# Altium PCB PCB1.PcbDoc
Units mm, origin at the board's own origin, x right, y up, seen from the top; angles counter-clockwise.
Board outline 96 x 98 mm, 2 copper layers (Top Layer, Bottom Layer); 46 components, 44 nets, 243 pads, 56 vias.
Unrouted connection lines stored in the file: 20.
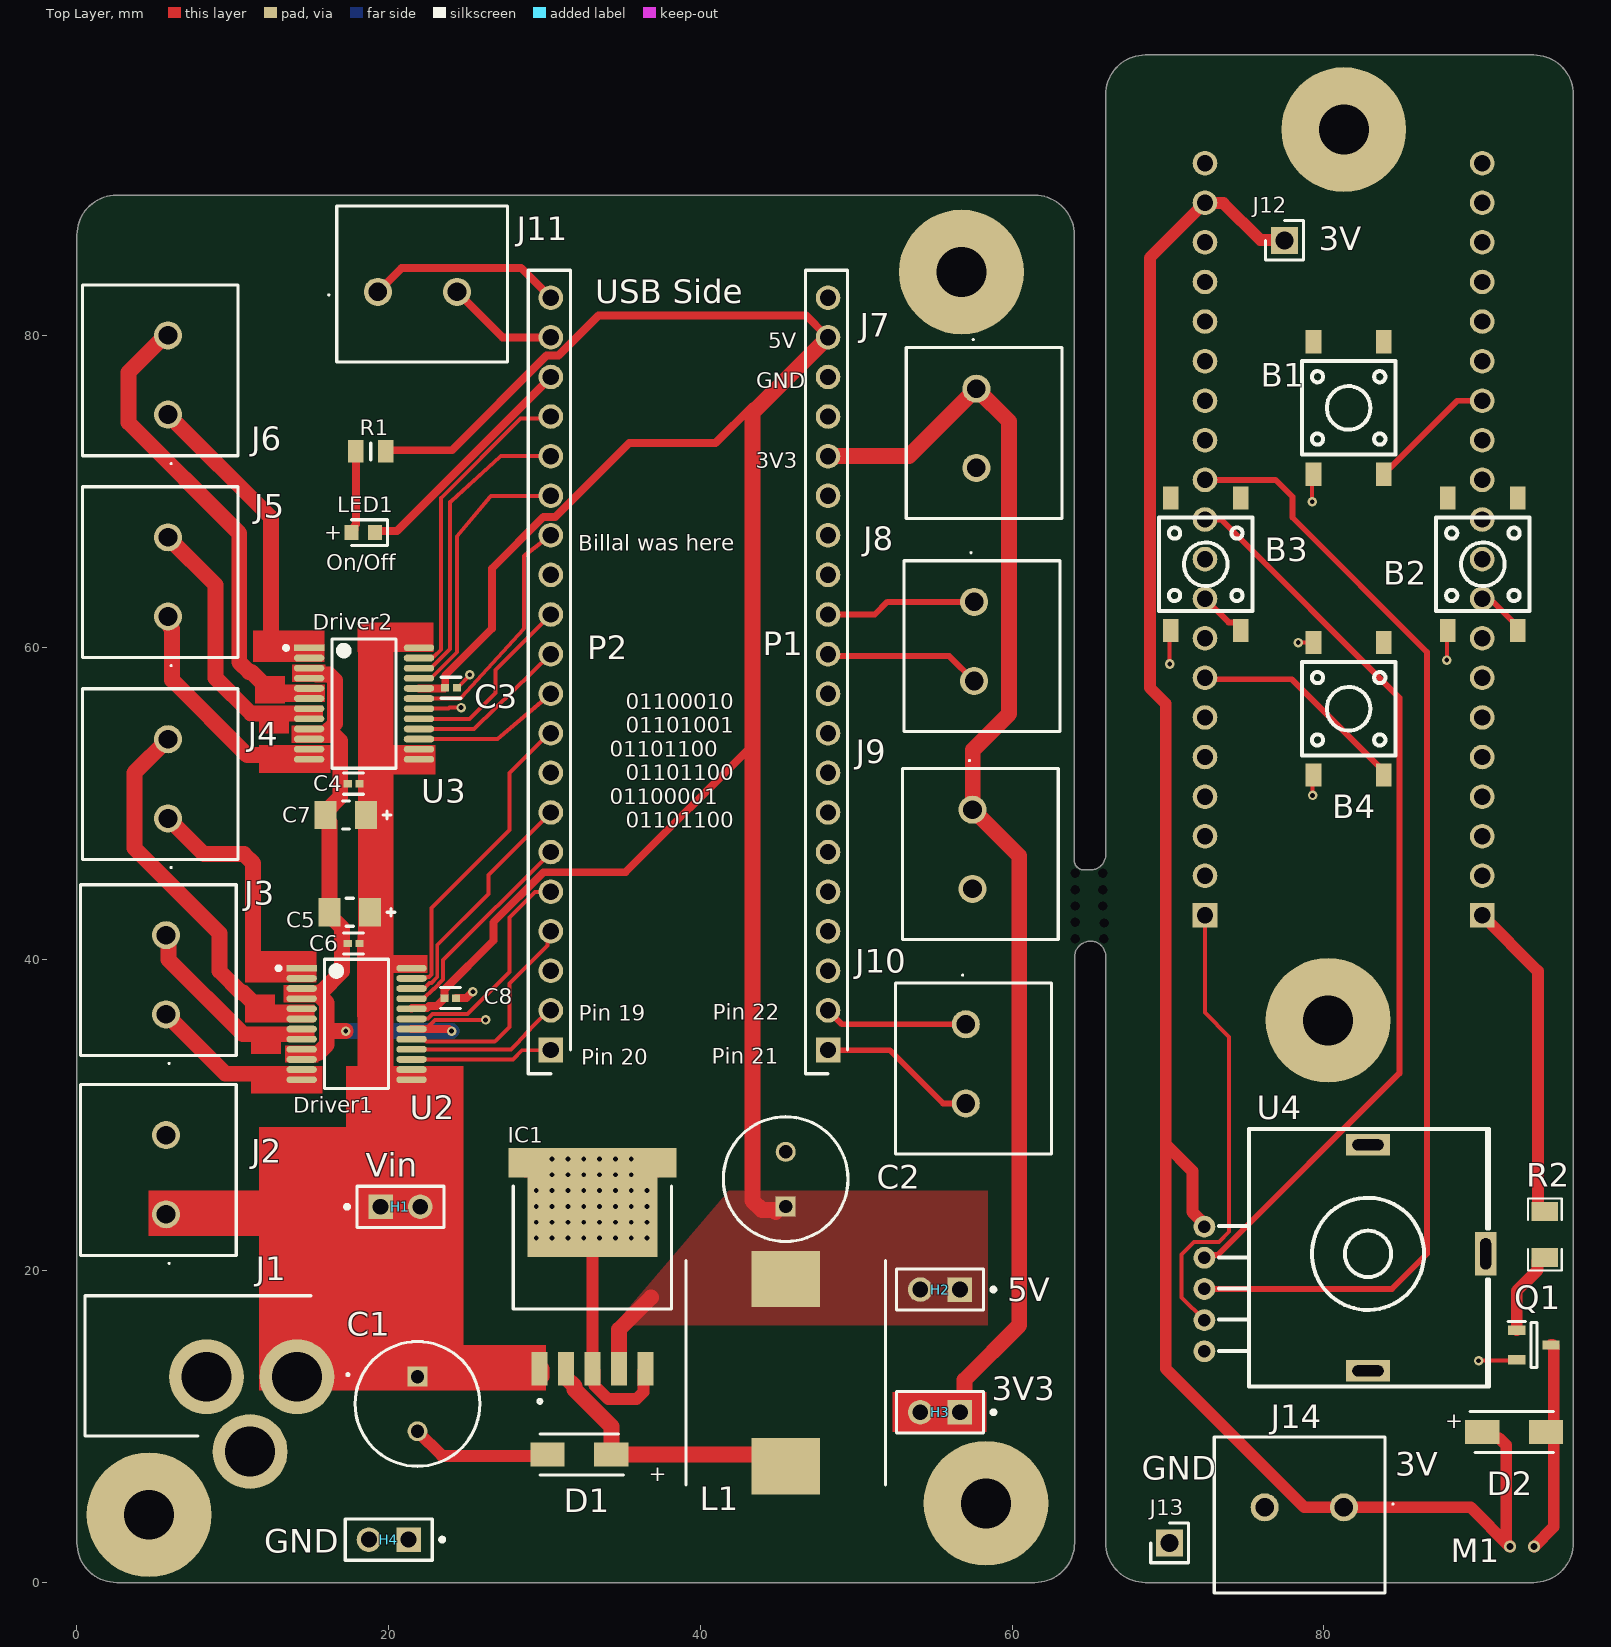
[diagram p0: Top Layer view]
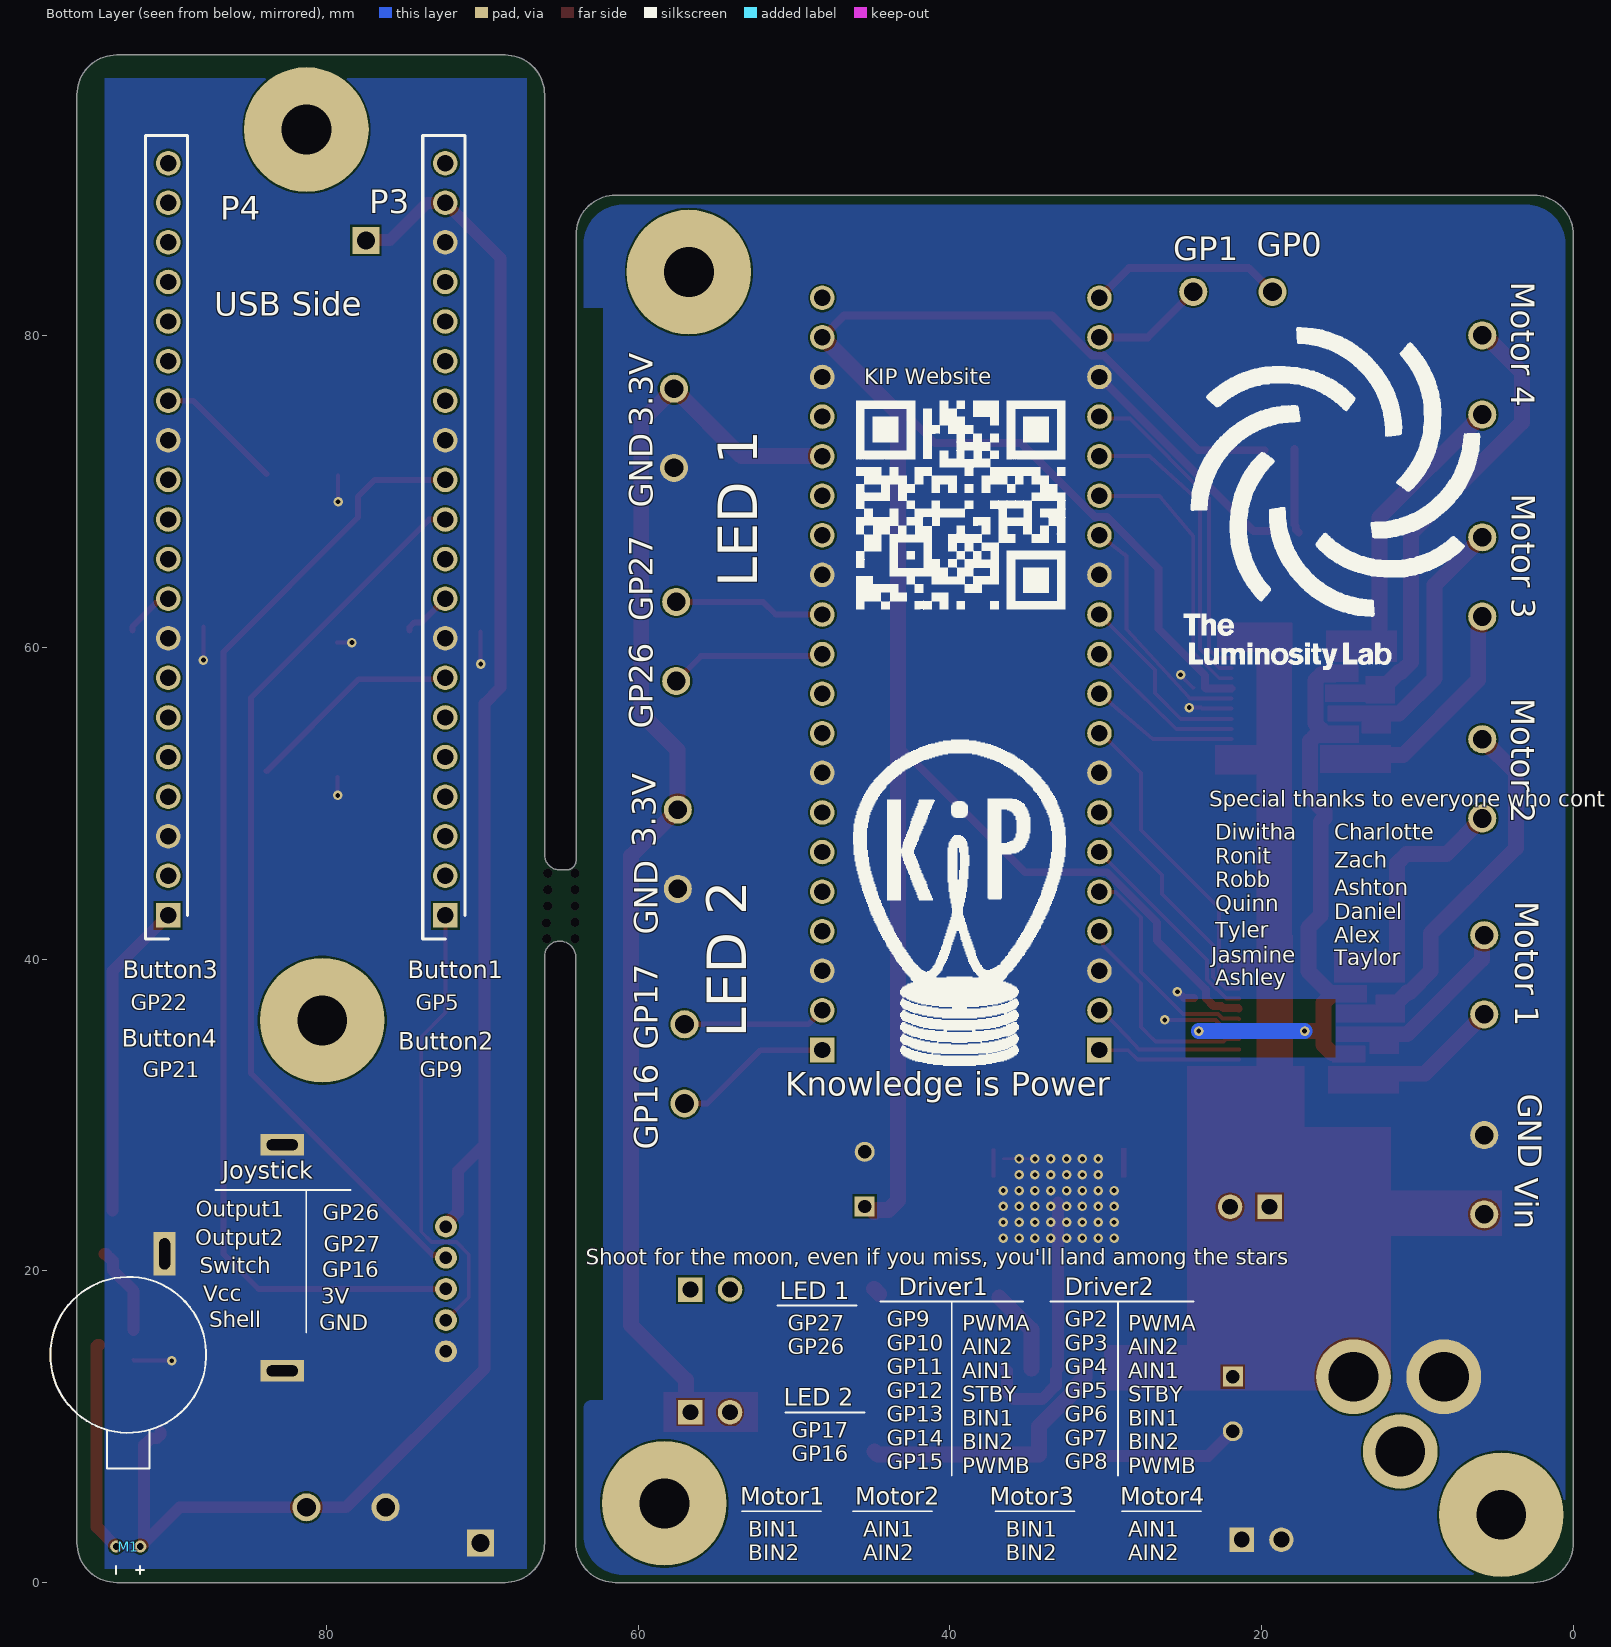
[diagram p1: Bottom Layer view, seen from below]
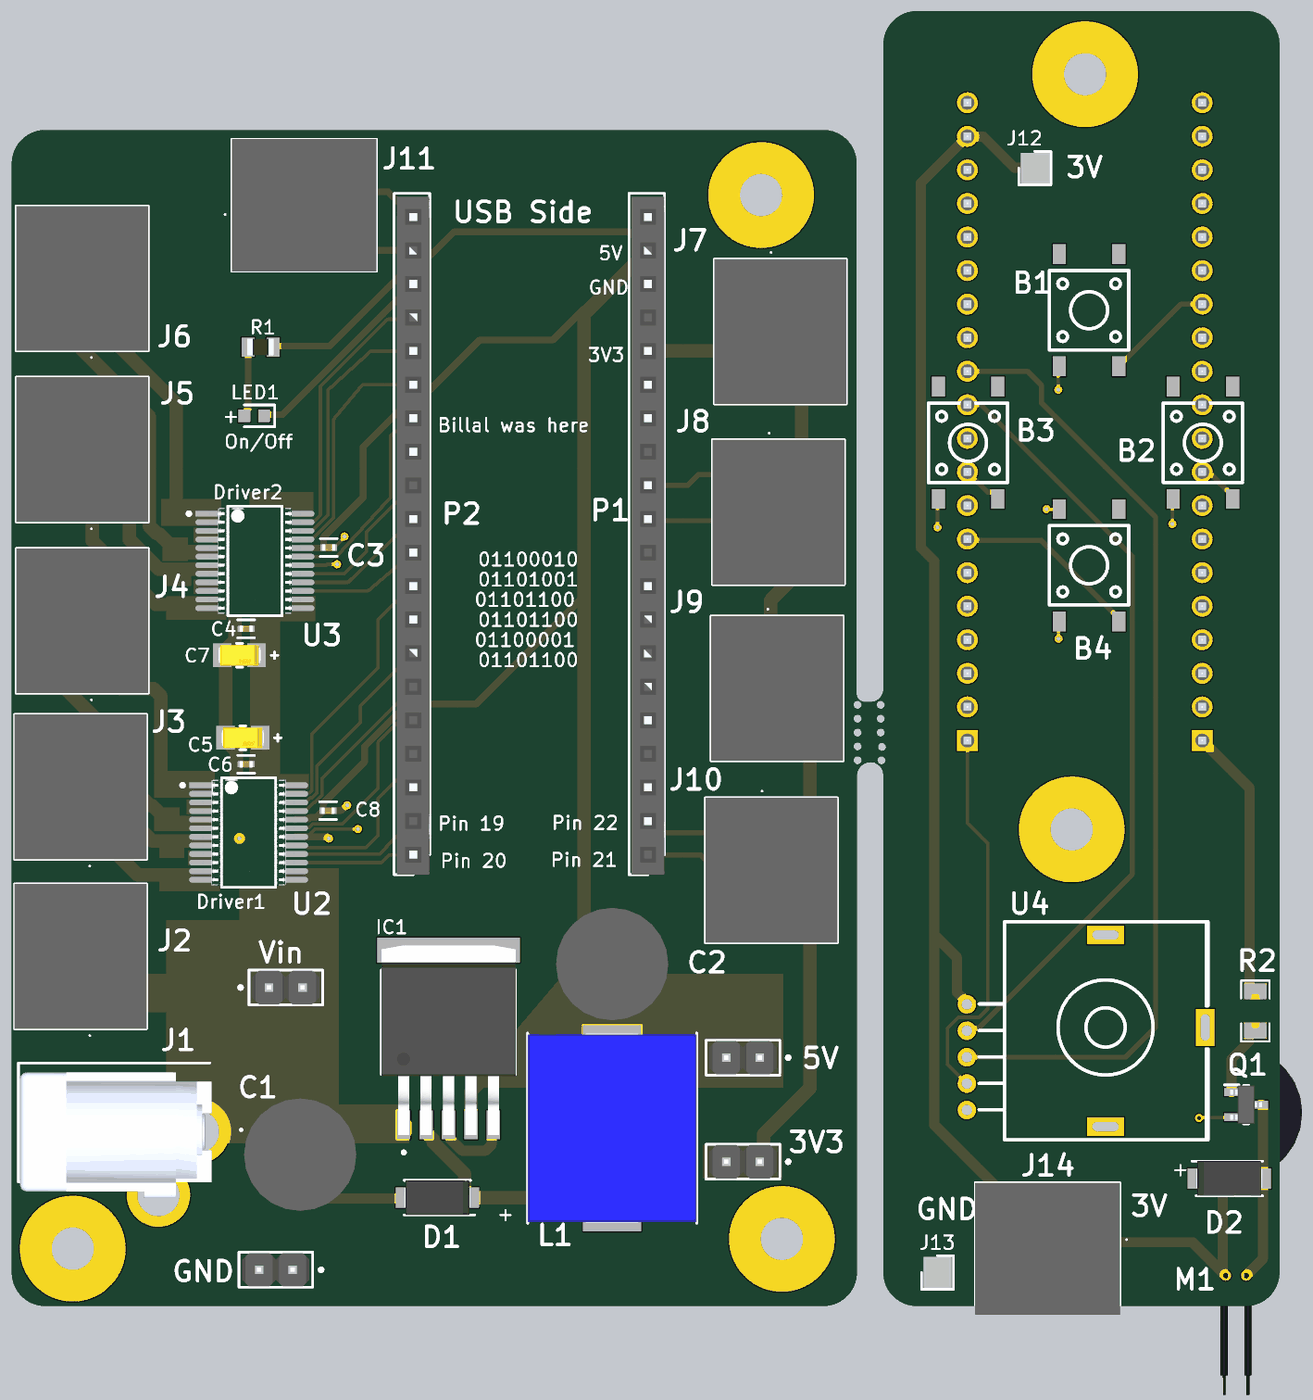
[diagram p2: 3D render of the assembled board from above, using the file's embedded part models]
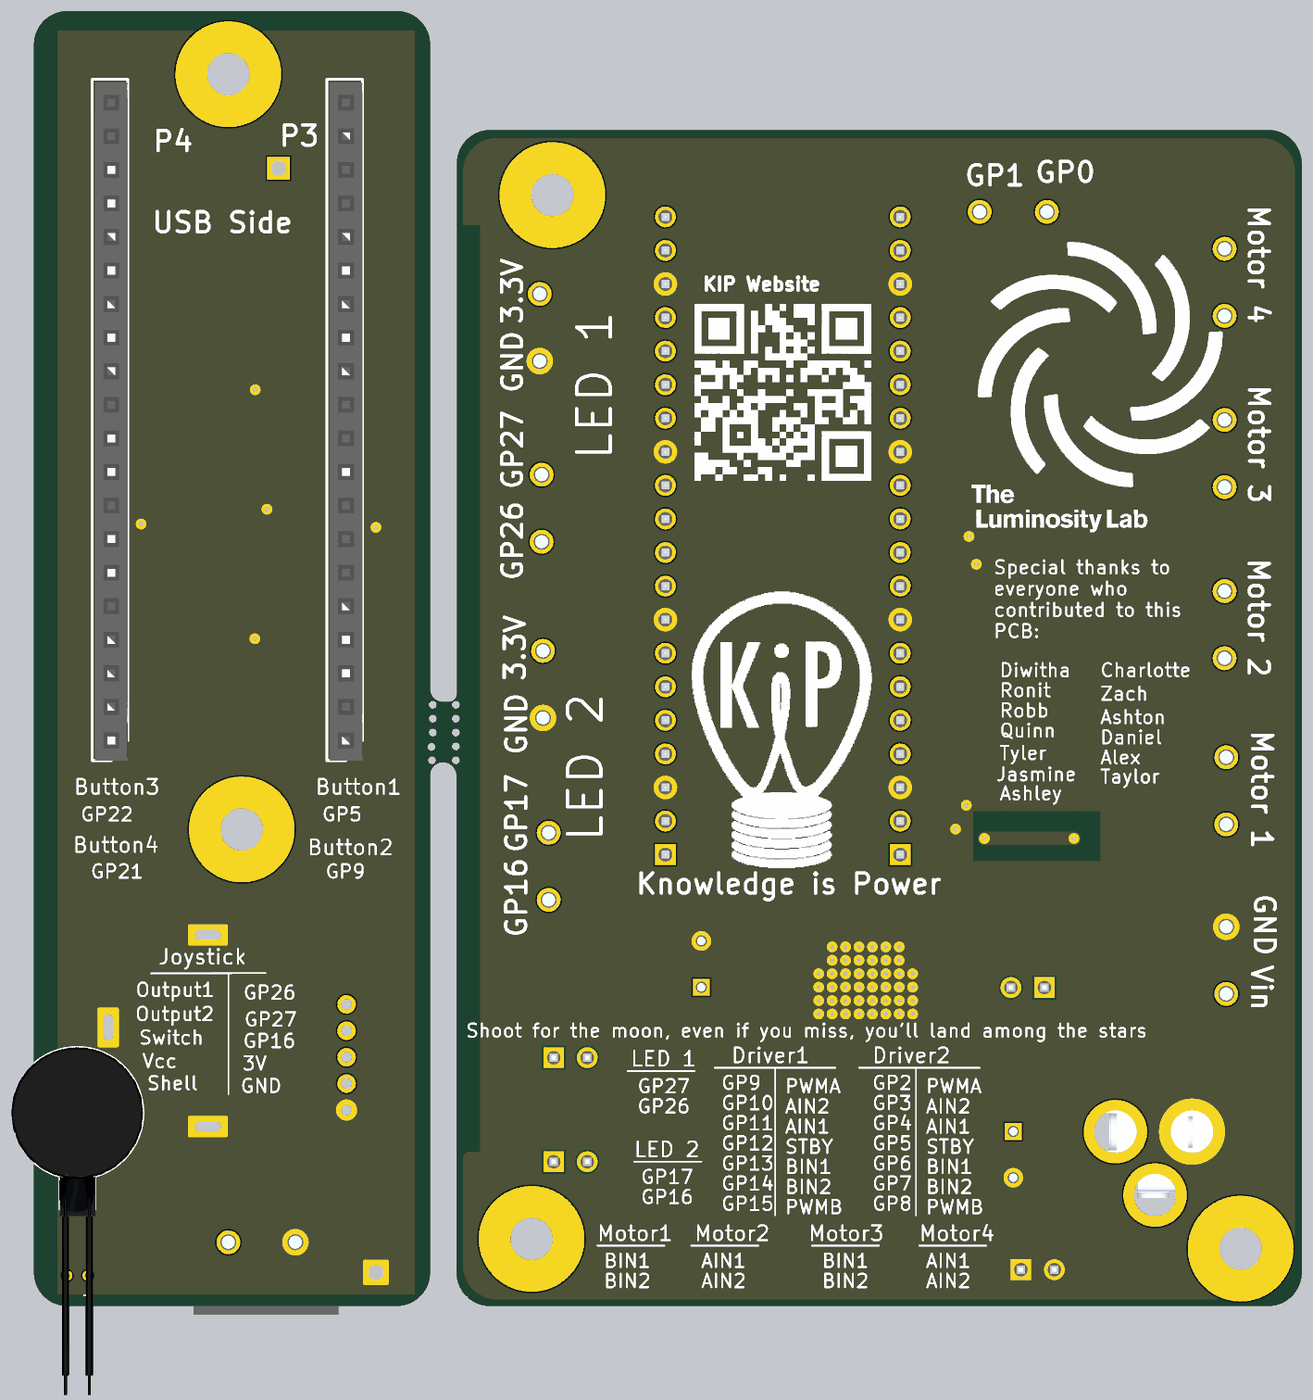
[diagram p3: 3D render of the assembled board from below, using the file's embedded part models]

## Layer stack, top to bottom
Top Solder: solder mask 0.0102, Solder Resist, Dk 3.5
Top Layer: signal copper 0.0356
Dielectric 1: dielectric 0.32, FR-4, Dk 4.8
Bottom Layer: signal copper 0.0356
Bottom Solder: solder mask 0.0102, Solder Resist, Dk 3.5

## Board outline
0,2.54 ccw(c2.54,2.54) 2.54,0 61.46,0 ccw(c61.46,2.54) 64,2.54 64,40.124 cw(c65.024,40.124) 65.024,41.148 cw(c65.024,40.172) 66,40.172 66,2.54 ccw(c68.54,2.54) 68.54,0 93.46,0 ccw(c93.46,2.54) 96,2.54 96,95.46 ccw(c93.46,95.46) 93.46,98 68.54,98 ccw(c68.54,95.46) 66,95.46 66,46.696 cw(c65.024,46.696) 65.024,45.72 64.592,45.72 cw(c64.592,46.33) 63.983,46.33 63.983,86.46 ccw(c61.443,86.46) 61.443,89 2.54,89 ccw(c2.54,86.46) 0,86.46 0,63

## Design rules (kind name [scope] priority, off if disabled: settings)
Clearance [All] p1: gap=0.127 ignorepadtopadclearanceinfootprint=TRUE
HoleSize [All] p1 off: absolutevalues=TRUE maxlimit=6.299 minlimit=0.152 maxpercent=80.000 minpercent=20.000
MinimumSolderMaskSliver [All] p1 off: minsoldermaskwidth=0.198
PolygonConnect [All] p1: connectstyle=Direct reliefconductorwidth=0.254 reliefentries=4 polygonreliefangle="90 Angle" airgapwidth=0.254
RoutingVias [All] p1: holewidth=0.305 width=0.61 viastyle="Through Hole" minholewidth=0.305 minwidth=0.457 maxholewidth=0.61 maxwidth=1.219
ShortCircuit [InNet('5V') vs InNet(' 5V')] p1: allowed=TRUE
SilkToSilkClearance [All] p1 off: silktosilkclearance=0.254
SilkToSolderMaskClearance [IsPad] p1 off: minsilkscreentomaskgap=0.178 clearancetoexposedcopper=TRUE
SolderMaskExpansion [All] p1: expansion=0.102 istentingtop=FALSE
SupplyNets "Schematic Supply Nets_4" [InNet('+3')] p1: voltage=0.000
SupplyNets "Schematic Supply Nets_3" [InNet('+12')] p2: voltage=0.000
SupplyNets "Schematic Supply Nets_2" [InNet('+5')] p3: voltage=0.000
SupplyNets "Schematic Supply Nets_1" [InNet('3V3')] p4: voltage=0.000
SupplyNets "Schematic Supply Nets" [InNet('GND')] p5: voltage=0.000
UnRoutedNet [All] p1 off:
Width Width_1 [All] p1 off: maxlimit=0.254 minlimit=0.254 preferedwidth=0.254
Width [All] p2: maxlimit=1.016 minlimit=0.102 preferedwidth=0.152
24 further rules are at their usual default settings.

## Classes and differential pairs
component class KIP_2Schematic: B1 B2 B3 B4 C1 C2 C3 C4 C5 C6 C7 C8 D1 D2 H1 H2 H3 H4 IC1 J1 J2 J3 J4 J5 J6 J7 J8 J9 J10 J11 J12 J13 J14 L1 LED1 M1 Q1 R1 R2 U2 U3 U4

## Components (designator, comment, footprint, x,y, rotation, side; value= is the part's Value field where it differs from the comment)
B1 "C255812" Button 81.534,75.438 r90 top
B2 "C255812" Button 90.148,65.405 r90 top
B3 "C255812" Button 72.368,65.405 r90 top
B4 "C255812" Button 81.534,56.134 r90 top
C1 "470uF" CAPPRD350W65D800H2200 21.844,13.208 r270 top
C2 "470uF" CAPPRD350W65D800H2200 45.466,24.13 r90 top
C3 "0.1uF" FP-CL779-IPC_C 24.003,57.404 r0 top
C4 "0.1uF" FP-CL779-IPC_C 17.75,51.25 r180 top
C5 "10uF" FP-TAJA-MFG 17.5,43 r0 top
C6 "0.1uF" FP-CL779-IPC_C 17.75,41 r180 top
C7 "10uF" FP-TAJA-MFG 17.25,49.25 r0 top
C8 "0.1uF" FP-CL779-IPC_C 23.952,37.49 r0 top
D1 "SS34A" DIOM5026X262N 32.233,8.204 r180 top
D2 "SS34A" DIOM5026X262N 92.202,9.652 r0 top
H1 "12V" FP-M20-9990246-MFG 20.752,24.105 r0 top
H2 "5V" FP-M20-9990246-MFG 55.372,18.796 r180 top
H3 "3V3" FP-M20-9990246-MFG 55.372,10.922 r180 top
H4 "GND" FP-M20-9990246-MFG 20,2.75 r180 top
IC1 "Buck Converter" KTT0005B 33.069,26.177 r270 top
J1 "Barrel Jack" 694106301002_1 0.508,9.398 r0 top
J2 "WJ500V-5.08-2P" WJ500V5082P 5.715,23.622 r90 top
J3 "WJ500V-5.08-2P" WJ500V5082P 5.715,36.449 r90 top
J4 "WJ500V-5.08-2P" WJ500V5082P 5.842,49.022 r90 top
J5 "WJ500V-5.08-2P" WJ500V5082P 5.842,61.976 r90 top
J6 "WJ500V-5.08-2P" WJ500V5082P 5.842,74.93 r90 top
J7 "WJ500V-5.08-2P" WJ500V5082P 57.7,76.59 r270 top
J8 "WJ500V-5.08-2P" WJ500V5082P 57.556,62.916 r270 top
J9 "WJ500V-5.08-2P" WJ500V5082P 57.455,49.581 r270 top
J10 "WJ500V-5.08-2P" WJ500V5082P 57.023,35.814 r270 top
J11 "WJ500V-5.08-2P" WJ500V5082P 19.304,82.804 r0 top
J12 "87224-1" HDRV1W66P0X254_1X1_213X254X1074P 77.47,86.106 r0 top
J13 "87224-1" HDRV1W66P0X254_1X1_213X254X1074P 70.104,2.54 r0 top
J14 "WJ500V-5.08-2P" WJ500V5082P 81.28,4.826 r180 top
L1 "33uH" INDPM144128X650N 45.466,13.462 r270 top
LED1 "KT-0603R" LEDC1608X70N 18.364,67.361 r180 top
M1 "Haptic Feedback" "Haptic Feedback" 92.456,14.478 r270 bottom
P1 "Comment" 20pin 48.184,34.163 r90 top
P2 "Comment" 20pin 30.404,34.163 r90 top
P3 "Comment" 20pin 72.368,42.799 r90 bottom
P4 "Comment" 20pin 90.148,42.799 r90 bottom
Q1 "C2150" SOT95P240X115-3N 93.472,15.24 r0 top
R1 "0805W8F2200T5E" RESC2013X65N 18.847,72.568 r180 top
R2 "C17887" "Resistor 300Ohms" 94.234,22.352 r270 top
U2 "TB6612FNG,C,8,EL" FP-SSOP24-P-300-0_65A-IPC_A 17.938,35.833 r0 top
U3 "TB6612FNG,C,8,EL" FP-SSOP24-P-300-0_65A-IPC_A 18.415,56.388 r0 top
U4 "C42411044" "Correct Joystick" 82.804,21.082 r270 top

## Footprints (in the part's own frame and the unit in brackets; to place one, negate y for a bottom-side part, rotate by r counter-clockwise, add the part's x,y. Pads: shape width x height; smd on the part's side, far side on the other; paste and mask are expansions set on the pad)
20pin [mm]
  rect 1.575x1.575 hole 1.05: 1(0,0)
  round 1.575 hole 1.05: 2(2.54,0) 3(5.08,0) 4(7.62,0) 5(10.16,0) 6(12.7,0) 7(15.24,0) 8(17.78,0) 9(20.32,0) 10(22.86,0) 11(25.4,0) 12(27.94,0) 13(30.48,0) 14(33.02,0) 15(35.56,0) 16(38.1,0) 17(40.64,0) 18(43.18,0) 19(45.72,0) 20(48.26,0)
  silkscreen extent -1.52,-1.25 50.03,1.45, body extent -1.52,-1.25 49.78,1.25, height 8.65
694106301002_1 [mm]
  round 4.8 hole 3.2: 1(13.6,3.8) 2(7.8,3.8) 3(10.6,-1)
  silkscreen extent 0,0 16.93,9, body extent 0.12,-1.22 14.62,8.28, height 11.02
Button [mm]
  rect 1.5x1 smd: 1(-4.33,2.202) 2(4.17,2.202) 3(-4.33,-2.298) 4(4.17,-2.298)
  silkscreen extent -3.08,-3.05 2.92,2.95
CAPPRD350W65D800H2200 [mm]
  rect 1.275x1.275 hole 0.85: 1(0,0)
  round 1.275 hole 0.85: 2(3.5,0)
  silkscreen extent -2.25,-4 5.75,4, body extent -2.49,-4.25 6,4.25, height 22
"Correct Joystick" [mm]
  round 1.4 hole 0.8: 1(-1.751,-10.476) 2(0.249,-10.476) 3(2.249,-10.476) 4(4.249,-10.476) 5(6.249,-10.476)
  rect 1.4x2.8 hole 0.7 slot 2 at 90 deg: 6(-7.001,0.024) 6(7.499,0.024)
  rect 2.8x1.4 hole 0.7 slot 2 at 0 deg: 6(-0.001,7.574)
  silkscreen extent -8,-9.55 8.51,7.77
DIOM5026X262N [mm]
  rect 2.2x1.55 smd: 1(-2.05,0) 2(2.05,0)
  silkscreen extent -2.83,-1.31 2.52,1.31, body extent -2.52,-1.31 2.52,1.31, height 2.62
FP-CL779-IPC_C [mm]
  rect 0.515x0.472 smd paste+0 mask+0: 1(-0.379,0) 2(0.379,0)
  silkscreen extent -0.64,-0.67 0.64,0.67, body extent -0.74,-0.38 0.74,0.38, height 0.25
FP-M20-9990246-MFG [mm]
  rect 1.57x1.57 hole 1.02 paste-2539.97 mask+0: 1(-1.27,0)
  round 1.57 hole 1.02 paste-2539.97 mask+0: 2(1.27,0)
  silkscreen extent -3.55,-1.32 2.79,1.32, body extent -2.89,-1.42 2.89,1.42, height 0.25
FP-SSOP24-P-300-0_65A-IPC_A [mm]
  rect 1.954x0.432 smd paste+0 mask+0: 1(-3.525,3.575)
  rrect100% 1.954x0.432 smd paste+0 mask+0: 2(-3.525,2.925) 3(-3.525,2.275) 4(-3.525,1.625) 5(-3.525,0.975) 6(-3.525,0.325) 7(-3.525,-0.325) 8(-3.525,-0.975) 9(-3.525,-1.625) 10(-3.525,-2.275) 11(-3.525,-2.925) 12(-3.525,-3.575) 13(3.525,-3.575) 14(3.525,-2.925) 15(3.525,-2.275) 16(3.525,-1.625) 17(3.525,-0.975) 18(3.525,-0.325) 19(3.525,0.325) 20(3.525,0.975) 21(3.525,1.625) 22(3.525,2.275) 23(3.525,2.925) 24(3.525,3.575)
  silkscreen extent -5.13,-4.15 2.05,4.15, body extent -5,-4.65 5,4.65, height 0.25
FP-TAJA-MFG [mm]
  rect 1.4x1.8 smd paste+0 mask+0: 1(-1.3,0) 2(1.3,0)
  silkscreen extent -0.23,-0.9 2.9,0.9, body extent -2.1,-1 2.1,1, height 0.25
"Haptic Feedback" [mm]
  round 0.78 hole 0.43: N(12.173,-1.026) P(12.173,0.518)
  silkscreen extent -5.13,-5.25 13.92,4.74, body extent -5.13,-5.25 21.22,4.75, height 2.7
HDRV1W66P0X254_1X1_213X254X1074P [mm]
  rect 1.725x1.725 hole 1.15: 1(0,0)
  silkscreen extent -1.21,-1.27 1.21,1.27, body extent -1.07,-1.17 1.07,1.17, height 10.37
INDPM144128X650N [mm]
  rect 3.6x4.4 smd: 1(-6,0) 2(6,0)
  silkscreen extent -7.2,-6.4 7.2,6.4, body extent -7.2,-6.4 7.2,6.4, height 6.5
KTT0005B [mm]
  rect 2.16x1.02 smd: 1(12.461,-3.4) 2(12.461,-1.7) 3(12.461,0) 4(12.461,1.7) 5(12.461,3.4)
  rect 6.99x8.33 smd: 6(1.786,0)
  rect 1.91x1.235 smd: 7(-0.754,4.782) 8(-0.754,-4.782)
  silkscreen extent 0.76,-5.08 14.68,5.08, body extent -1.11,-5.08 13.24,5.08, height 4.72
LEDC1608X70N [mm]
  rect 0.9x0.95 smd: 1(-0.75,0) 2(0.75,0)
  silkscreen extent -1.55,-0.82 0.75,0.82
RESC2013X65N [mm]
  rect 1x1.45 smd: 1(-0.95,0) 2(0.95,0)
  silkscreen extent 0,-0.54 0,0.54, body extent -1,-0.64 1,0.64, height 0.65
"Resistor 300Ohms" [mm]
  rect 1.208x1.701 smd paste-100 mask+0.051: 1(-1.454,-0.064) 2(1.504,-0.064)
  silkscreen extent -2.29,-1.14 2.34,1.02
SOT95P240X115-3N [mm]
  rect 1.1x0.6 smd: 1(-1.1,0.95) 2(-1.1,-0.95) 3(1.1,0)
  silkscreen extent -1.65,-1.45 0.2,1.5, body extent -1.2,-1.45 1.2,1.45, height 1.15
WJ500V5082P [mm]
  round 1.8 hole 1.2: 1(0,0) 2(5.08,0)
  silkscreen extent -3.2,-4.5 8.32,5.5, body extent -2.64,-4.5 8.32,5.5, height 14.3

## Part data
B1 B2 B3 B4: library part 1TS005F-2500-5001, "Switch", Manufacturer_Name="HYP (Hongyuan Precision)", Datasheet Link=https://datasheet.lcsc.com/szlcsc/HYP-1TS005F-2500-5001_C255812.pdf, Height=5.1mm, Manufacturer_Part_Number=1TS005F-2500-5001
C1 C2: library part EEU-FR1V471LB, "C178717", Manufacturer_Name=Panasonic, Mouser Part Number=667-EEU-FR1V471LB, Arrow Part Number=EEU-FR1V471LB, Arrow Price/Stock=https://www.arrow.com/en/products/eeu-fr1v471lb/panasonic?region=nac, Datasheet Link=http://industrial.panasonic.com/cdbs/www-data/pdf/RDF0000/ABA0000C1259.pdf, Height=22mm, Manufacturer_Part_Number=EEU-FR1V471LB, Mouser Price/Stock=https://www.mouser.co.uk/ProductDetail/Panasonic/EEU-FR1V471LB?qs=n1SRcuzDZT29cYaqooxsEQ%3D%3D
C3 C4 C6 C8: library part CMP-13271-002336-1, "C307331", LCSC=C307331
C5 C7: library part CMP-1661-00004-2, "C7171", Case Code (Imperial)=1206, Case Code (Metric)=3216, Dielectric Material=Tantalum, ESR (Equivalent Series Resistance)=3R, Leakage Current=1.6uA, Max Operating Temperature=125°C, Min Operating Temperature=-55°C, Package Quantity=1, Tolerance=10%, Voltage=16V, Capacitance=10uF, Case/Package=1206, Depth=1.6mm, Dissipation Factor=8%, Features="General Purpose", Height=1.6mm, Height - Seated (Max)=0.071inch, LCSC=C7171, Lead Free="Lead Free", Lead Pitch=1.1mm, Length=3.2mm, Mount="Surface Mount", Number of Pins=2, Packaging="Tape and Reel", Polarity=Polar, Radiation Hardening=No, REACH SVHC="No SVHC", Termination=SMD/SMT, Voltage Rating=16V, Voltage Rating (DC)=16V, Width=1.6mm
D1 D2: "Diode", Manufacturer_Name="HY Electronic", Datasheet Link=https://datasheet.datasheetarchive.com/originals/distributors/Datasheets-3/DSA-43252.pdf, Height=2.62mm, Manufacturer_Part_Number=SS34A
H1 H2 H3 H4: library part CMP-15831-000009-1, "C492401", Current Rating=3A, Manufacturer=Harwin, Manufacturer Part Number=M20-9990246, Temperature="-40°C to +105°C", Temperature Range High=+105°C, Temperature Range Low=-40°C, Automotive=No, Category=Conn, ComponentLink2Description=Datasheet, ComponentLink2URL=https://cdn.harwin.com/pdfs/M20-999.pdf, Conn Gender=Male, Conn Orientation=Vertical, Contact Material=Tin,Nickel, Device Class L1=Connectors, Device Class L2="Headers and Wire Housings", Device Class L3=unset, Digikey Description="CONN HEADER VERT 2POS 2.54MM", Height=8.99mm, Lead Free=Yes, Mouser Description="2.54mm (0.1\") Pitch SIL Vertical PC Tail Pin Header, 6.1mm mating pin height, tin, 2 contacts", Number of Contacts=2, Number of Rows=1, Octopart=https://octopart.com/m20-9990246-harwin-2590635, Package=M20-9990246, Pitch=2.54mm, RoHS=TRUE
IC1: library part LM2596SX-5.0_NOPB, "C10002", Arrow Part Number=LM2596SX-5.0/NOPB, Manufacturer_Name="Texas Instruments", Mouser Part Number=926-LM2596SX-5.0NOPB, Arrow Price/Stock=https://www.arrow.com/en/products/lm2596sx-5.0nopb/texas-instruments?utm_currency=USD&region=nac, Datasheet Link=http://www.ti.com/lit/gpn/lm2596, LCSC=C10002, Manufacturer_Part_Number=LM2596SX-5.0/NOPB, Mouser Price/Stock=https://www.mouser.co.uk/ProductDetail/Texas-Instruments/LM2596SX-5.0-NOPB?qs=X1J7HmVL2ZGZ5T4VcWdmNw%3D%3D
J1: library part 694106301002, "C5441017", Manufacturer_Name="Wurth Elektronik", Mouser Part Number=710-694106301002, Datasheet Link=https://datasheet.datasheetarchive.com/originals/distributors/Datasheets_SAMA/1c153bd2ba42bb51bda59ee4cd9765cd.pdf, LCSC=C5441017, Manufacturer_Part_Number=694106301002, Mouser Price/Stock=https://www.mouser.co.uk/ProductDetail/Wurth-Elektronik/694106301002?qs=a9WhcLg8qCwOEkcI62k5mA%3D%3D
J2 J3 J4 J5 J6 J7 J8 J9 J10 J11 J14: "C8465", Manufacturer_Name="Ningbo Kangnex", Datasheet Link=https://datasheet.lcsc.com/szlcsc/1912251636_Ningbo-Kangnex-Elec-WJ500V-5-08-2P_C8465.pdf, Height=14.2mm, LCSC=C8465, Manufacturer_Part_Number=WJ500V-5.08-2P
J12 J13: "Connector", Manufacturer_Name="TE Connectivity", Mouser Part Number=571-872241, Arrow Part Number=87224-1, Arrow Price/Stock=https://www.arrow.com/en/products/87224-1/te-connectivity?region=nac, Datasheet Link=https://www.te.com/commerce/DocumentDelivery/DDEController?Action=srchrtrv&DocNm=87224&DocType=Customer+Drawing&DocLang=English, Height=10.744mm, Manufacturer_Part_Number=87224-1, Mouser Price/Stock=https://www.mouser.co.uk/ProductDetail/TE-Connectivity/87224-1?qs=uJX40y%252BSWqgHHhtbHlovpg%3D%3D
L1: library part SLO1365H330MTT, "C364090", Manufacturer_Name="Sunltech Tech", Datasheet Link=https://datasheet.lcsc.com/lcsc/1912111437_Sunltech-Tech-SLO1365H330MTT_C364090.pdf, Height=6.5mm, Manufacturer_Part_Number=SLO1365H330MTT
LED1: "C2286", Manufacturer_Name="Hubei KENTO Elec", Datasheet Link=https://datasheet.lcsc.com/szlcsc/Hubei-KENTO-Elec-KT-0603R_C2286.pdf, Height=0.7mm, LCSC=C2286, Manufacturer_Part_Number=KT-0603R
Q1: library part SS8050-G, Manufacturer_Name="Comchip Technology", Mouser Part Number=750-SS8050-G, Arrow Part Number=SS8050-G, Arrow Price/Stock=https://www.arrow.com/en/products/ss8050-g/comchip-technology?region=nac, Datasheet Link=https://datasheet.datasheetarchive.com/originals/distributors/DKDS-12/229454.pdf, Height=1.15mm, Manufacturer_Part_Number=SS8050-G, Mouser Price/Stock=https://www.mouser.co.uk/ProductDetail/Comchip-Technology/SS8050-G?qs=LLUE9lz1YbcHg%252BWLMAtcrQ%3D%3D
R1: "C17557", Manufacturer_Name=ROYALOHM, Mouser Part Number=303-0805W8F2200T5E, Datasheet Link=https://datasheet.lcsc.com/lcsc/2206010200_UNI-ROYAL-Uniroyal-Elec-0805W8F4700T5E_C17710.pdf, Height=0.65mm, LCSC=C17557, Manufacturer_Part_Number=0805W8F2200T5E, Mouser Price/Stock=https://www.mouser.co.uk/ProductDetail/Royalohm/0805W8F2200T5E?qs=e8oIoAS2J1ROMjq8h%252B%2Fhvg%3D%3D
R2: library part "Resistor 300Ohms"
U2 U3: library part CMP-2100-03693-4, "C88224", Case/Package=SSOP, Max Operating Temperature=85°C, Max Supply Voltage=5.5V, Min Operating Temperature=-20°C, Min Supply Voltage=2.7V, Operating Supply Voltage=3V, Output Current=1A, Package Quantity=1, Interface=Parallel, Logic Function="AND GATE", Mount="Surface Mount", Number of Outputs=2, Number of Pins=24, Packaging="Tape and Reel", Series=-
U4: library part "YHE-YG16-001 SH1B166A1", Manufacturer=YTL(亚特联), Add into BOM=yes, Convert to PCB=yes, Datasheet=https://atta.szlcsc.com/upload/public/pdf/source/20241210/EC2F2FFC22DA7A673EF560687C693A55.pdf, Device="YHE-YG16-001 SH1B166A1", LCSC Part Name="YHE-YG16-001 SH1B166A1", Manufacturer Part="YHE-YG16-001 SH1B166A1", Supplier=LCSC, Supplier Footprint=插件, Supplier Part=C42411044, Symbol="YHE-YG16-001 SH1B166A1"

## Free pads (board coordinates)
  round 8 hole 3.2 unplated: 1(4.623,4.343) 1(56.744,84.074) 1(58.318,5.08) 1(80.264,36.068) 1(81.28,93.218)
  round 0 hole 0.6 unplated: 3(64.05,41.3) 3(64.05,42.35) 3(64.05,43.4) 3(64.05,44.45) 3(64.05,45.5) 3(65.8,43.4) 3(65.8,44.45) 3(65.8,45.5) 3(65.862,41.3) 3(65.9,42.314)

## Via types
v1: diameter 0.61, hole 0.305, Top Layer to Bottom Layer, 56 vias

## Nets (pads, with @x,y where several pads share a name; then routed paths per layer and width w, separated by ;. In a path a pad name is that pad's centre, name@x,y a point inside that pad or via, vN(x,y) a via of type N, cw(c..) or ccw(c..) an arc to the next point about the centre after c; other vN are vias at no path point)
3V3: H3.1 H3.2 J7.1 J9.1 P1.16 | length 83.2
  Top Layer w1.016: P1.16 53.373,72.263 J7.1 ; 55.089,10.783 56.303,10.783 H3.1@56.547,11.027 ; H3.1@56.553,11.174 56.936,11.557 56.936,12.994 60.452,16.51 60.452,46.609 57.468,49.593 57.468,53.404 59.8,55.736 59.8,74.49 J7.1 ; J7.1@57.891,76.699 57.85,76.74 J7.1
+3: D2.1 J12.1 J14.1 M1.P P3.19 U4.1 | length 124.3
  Top Layer w0.762: U4.1 72.328,23.006 71.566,23.768 71.566,26.389 69.85,28.105 ; P3.19 72.388,88.499 73.553,88.499 75.911,86.141 77.499,86.141 J12.1@77.534,86.106 ; P3.19@72.523,88.675 68.834,84.985 68.834,57.404 69.85,56.388 69.85,28.105 ; D2.1@90.642,9.652 90.642,9.487 90.871,9.258 91.248,9.258 91.694,8.812 91.694,2.554 91.938,2.31 M1.P ; M1.P@91.935,2.308 89.417,4.826 78.74,4.826 69.85,13.716 69.85,28.105
+5: C2.1 C3.1 C8.1 H2.1 H2.2 IC1.4 L1.1 P1.19 R1.1 U2.20 U3.20 | length 158.9
  Top Layer w0.508: R1.1@19.797,72.644 24.052,72.644 30.123,78.714 30.888,78.714 33.453,81.28 46.787,81.28 P1.19@48.039,80.027 ; U2.20 21.501,36.846 22.456,36.846 22.593,36.982 23.08,36.982 23.574,37.476 C8.1 23.577,37.494 23.577,38.042 26.714,41.178 26.714,42.355 29.926,45.568 35.179,45.568 43.332,53.721 ; U3.20 23.583,57.363 C3.1 23.624,58.203 26.613,61.192 26.613,65.045 29.92,68.352 30.685,68.352 35.433,73.1 40.969,73.1 43.332,75.463
  Top Layer w1.016: IC1.4 34.769,16.227 36.83,18.288 ; L1.1@44.526,18.512 L1.1@44.861,18.847 ; C2.1@44.831,23.774 44.701,23.904 43.928,23.904 43.332,24.499 43.332,53.721 43.332,75.032 P1.19
+12: C1.1 C4.1 C5.2 C6.1 C7.2 H1.1 H1.2 IC1.1 J1.1 J2.1 U2.13 U2.14 U2.24 U3.13 U3.14 U3.24 | length 5.3
  Top Layer w0.762: 18.351,36.386 C6.1@18.351,41.148
  Top Layer w1.016: IC1.1@29.794,13.208 29.796,13.21 IC1.1@29.796,13.716
A01_1: J4.1 U2.1 U2.2 | length 16.1
  Top Layer w1.016: J4.1 8.128,46.736 10.708,46.736 11.303,46.141 11.303,40.005 11.9,39.408 U2.1
A01_2: J6.1 U3.1 U3.2 | length 16.6
  Top Layer w1.016: J6.1 12.446,68.326 12.446,61.066
A02_1: J4.2 U2.5 U2.6 | length 21.8
  Top Layer w1.016: J4.2 3.681,51.941 3.681,47.119 9.144,41.656 9.144,39.234 10.532,37.846 10.668,37.846 11.684,36.83 11.938,36.83
A02_2: J6.2 U3.5 U3.6 | length 27.9
  Top Layer w1.016: J6.2 5.675,80.01 3.302,77.637 3.302,74.422 10.414,67.31 10.414,59.046 11.04,58.42 11.176,58.42 12.446,57.15
B01_1: J3.1 U2.11 U2.12 | length 8.3
  Top Layer w1.016: J3.1 9.525,32.639 11.684,32.639 11.938,32.385 11.938,32.004
B01_2: J5.1 U3.11 U3.12 | length 13.1
  Top Layer w1.016: J5.1@6.056,62.274 5.992,62.21 5.992,61.272 6.096,61.168 6.096,57.912 10.924,53.084 12.448,53.084 12.7,52.832
B02_1: J3.2 U2.7 U2.8 | length 9.7
  Top Layer w1.016: J3.2 5.865,41.379 5.865,39.973 10.659,35.179 11.811,35.179 11.938,35.052
B02_2: J5.2 U3.7 U3.8 | length 15.1
  Top Layer w1.016: J5.2@5.833,67.065 8.897,64.001 8.897,58.023 11.167,55.753 12.573,55.753 12.7,55.626
GND: B1.1 B1.2 B2.1 B2.2 B3.1 B3.2 B4.1 B4.2 C1.2 C2.2 C3.2 C4.2 C5.1 C6.2 C7.1 C8.2 D1.2 H4.1 H4.2 IC1.3 IC1.5 IC1.6 IC1.7 IC1.8 J1.2 J2.2 J7.2 J9.2 J13.1 J14.2 LED1.1 P1.3 P1.8 P1.13 P1.18 P2.3 P2.8 P2.13 P2.18 P3.8 P3.13 P3.18 P4.3 P4.8 P4.13 Q1.2 U2.3 U2.4 U2.9 U2.10 U2.18 U3.3 U3.4 U3.9 U3.10 U3.18 U4.5 U4.6 | length 108.7
  Top Layer w0.152: v1(34.544,27.178) v1(35.56,27.178) IC1.6@36.576,27.178
  Top Layer w0.254: U3.18 23.825,56.063 23.896,56.134 v1(24.638,56.134) ; U2.18@22.409,35.542 22.961,36.093 v1(26.213,36.093) ; C3.2 24.403,57.404 25.222,58.223 v1@25.222,58.293 ; v1(70.104,58.928) B3.1@70.104,61.013 ; U4.5@72.396,14.901 U4.5@72.45,14.847 ; v1(78.359,60.3) 79.328,60.3 B4.2 ; v1(79.248,69.342) B1.1@79.248,71.024 ; v1(79.273,50.495) B4.1@79.273,51.695 ; v1(87.884,59.182) B2.1@87.884,61.336 ; v1(89.916,14.224) 89.949,14.257 92.339,14.257 Q1.2
  Top Layer w0.508: LED1.1 19.22,67.466 20.527,67.466 P2.18 ; U2.18 23.875,35.508 24.001,35.382 v1(24.028,35.382) ; C8.2 24.331,37.504 24.334,37.508 24.984,37.508 25.373,37.897 v1(25.4,37.897)
  Top Layer w0.762: J1.2@7.112,13.283 J1.2@8.763,14.934 ; C1.2 23.424,8.128 D1.2@30.347,8.128 ; IC1.6 IC1.3 33.198,13.587 33.198,12.649 34.085,11.762 35.894,11.762 36.34,12.208 36.34,13.587 IC1.5
  Top Layer w1.016: 14.173,37.719 15.503,37.719 16.024,37.198 16.024,35.382 ; 14.412,33.883 14.489,33.96 15.479,33.96 16.024,34.505 16.024,35.382 ; 15.359,58.257 16.18,58.257 16.552,57.885 16.552,55.111 15.925,54.484 14.936,54.484 14.884,54.432 14.935,54.382 16.397,54.382 16.423,54.356 16.519,54.356 16.891,53.984 16.891,50.391 15.95,49.45 C7.1 ; 15.5,37.846 15.63,37.846 17,39.216 17,42 C5.1@16.2,42.8 ; C7.1@15.95,49.05 16.2,48.8 C5.1 ; v1(17.247,35.382) 16.024,35.382
  Bottom Layer w1.016: v1(17.247,35.382) v1(24.028,35.382)
  other v1: 29.464,22.098 30.48,22.098 31.496,22.098 32.512,22.098 33.528,22.098 34.544,22.098 35.56,22.098 36.576,22.098 29.464,23.114 30.48,23.114 31.496,23.114 32.512,23.114 33.528,23.114 34.544,23.114 35.56,23.114 36.576,23.114 29.464,24.13 30.48,24.13 31.496,24.13 32.512,24.13 33.528,24.13 34.544,24.13 35.56,24.13 36.576,24.13 29.464,25.146 30.48,25.146 31.496,25.146 32.512,25.146 33.528,25.146 34.544,25.146 35.56,25.146 36.576,25.146 30.48,26.162 31.496,26.162 32.512,26.162 33.528,26.162 34.544,26.162 35.56,26.162 30.48,27.178 31.496,27.178 32.512,27.178 33.528,27.178 25.198,58.238
GP0: J11.1 P2.20 | length 12.5
  Top Layer w0.508: J11.1 20.828,84.328 28.499,84.328 P2.20
GP1: J11.2 P2.19 | length 7.2
  Top Layer w0.508: J11.2 27.305,79.883 P2.19
GP2: P2.17 U3.23 | length 20.7
  Top Layer w0.254: U3.23 22.749,59.313 22.838,59.402 22.916,59.402 23.368,59.854 23.368,69.589 28.455,74.676 30.277,74.676 P2.17@30.478,74.877
GP3: P2.16 U3.22 | length 19.5
  Top Layer w0.254: U3.22 22.716,58.663 23.944,59.891 23.944,69.308 24.023,69.387 27.122,72.197 27.195,72.263 P2.16
GP4: P2.15 U3.21 | length 17.8
  Top Layer w0.254: U3.21 22.716,58.013 24.384,59.681 24.384,67.123 26.482,69.626 26.49,69.634 26.564,69.708 P2.15@30.404,69.708
GP5: B1.3 P2.14 P4.14 U3.19 | length 23.8
  Top Layer w0.254: U3.19 24.582,56.713 24.66,56.791 28.659,61.163 28.677,61.243 28.677,65.843 28.763,65.929 28.776,65.939 P2.14
  Top Layer w0.381: B1.3 88.543,75.819 P4.14
GP6: P2.12 P4.12 U3.17 | length 12.1
  Top Layer w0.254: U3.17 25.187,55.413 26.848,57.074 26.848,58.547 P2.12
GP7: P2.11 P4.11 U3.16 | length 10.4
  Top Layer w0.254: U3.16 25.47,54.763 25.571,54.864 P2.11
GP8: P2.10 P4.10 U3.15 | length 9.5
  Top Layer w0.254: U3.15 23.84,54.113 26.983,54.113 P2.10
GP9: B2.3 P2.9 P4.9 U2.23 | length 23.4
  Top Layer w0.254: U2.23@21.48,38.741 21.531,38.792 22.384,38.792 22.437,38.845 22.584,38.845 22.733,38.994 22.733,43.275 27.75,48.292 27.75,51.943 30.282,54.476 P2.9@30.404,54.476
  Top Layer w0.381: P4.9 90.376,62.891 90.88,62.891 92.446,61.325 B2.3
GP10: P2.7 P4.7 U2.22 | length 15.5
  Top Layer w0.254: U2.22 22.272,38.108 22.628,38.464 22.742,38.464 23.114,38.836 23.114,40.894 26.392,44.172 26.392,45.391 P2.7
GP11: P2.6 P4.6 U2.21 | length 13.6
  Top Layer w0.254: U2.21 22.239,37.458 22.864,38.083 22.9,38.083 23.495,38.678 23.495,39.939 P2.6@30.404,46.848
GP12: P2.5 P4.5 U2.19 | length 14.4
  Top Layer w0.254: U2.19 21.497,36.192 22.521,36.192 22.803,36.474 25.044,36.474 27.75,39.18 27.75,42.673 29.384,44.307 30.388,44.307 P2.5
GP13: P2.4 P4.4 U2.17 | length 14
  Top Layer w0.254: U2.17 22.272,34.858 22.434,34.696 26.699,34.696 26.8,34.696 26.873,34.766 27.011,34.895 27.014,34.898 27.75,35.634 27.75,38.418 30.187,40.855 30.187,41.566 P2.4
GP14: P2.2 P4.2 U2.16 | length 10
  Top Layer w0.254: U2.16 27.858,34.208 28.194,34.544 29.298,35.729 30.272,36.703 P2.2
GP15: P2.1 P4.1 R2.1 U2.15 | length 29.6
  Top Layer w0.254: U2.15 27.97,33.558 28.56,34.148 P2.1@30.404,34.148
  Top Layer w0.762: P4.1 93.726,39.221 R2.1@93.726,23.876
GP16: J10.2 P1.1 P3.1 U4.4 | length 39.7
  Top Layer w0.254: U4.4 70.866,18.295 70.866,21.057 71.653,21.844 73.254,21.844 73.914,22.504 73.914,35.009 72.368,36.555 P3.1
  Top Layer w0.381: P1.1@48.184,34.148 52.159,34.148 55.573,30.734 J10.2
GP17: J10.1 P1.2 | length 9.6
  Top Layer w0.381: P1.2 49.073,35.814 J10.1@57.389,35.814
GP18: P1.4
GP19: P1.5
GP20: P1.6
GP21: B4.3 P1.7 P3.7 | length 13.9
  Top Layer w0.381: P3.7@72.368,57.949 77.937,57.949 B4.3@83.832,52.054
GP22: B3.3 P1.9 P3.9 | length 3.3
  Top Layer w0.381: P3.9 73.891,61.596 74.356,61.596 74.666,61.287 B3.3
GP26: J8.2 P1.11 P3.11 U4.2 | length 68.9
  Top Layer w0.381: P1.11@48.052,59.431 55.961,59.431 J8.2 ; U4.2 72.508,21.013 73.184,21.013 84.84,32.668 84.84,56.764 73.405,68.199 P3.11
GP27: J8.1 P1.12 P3.12 U4.3 | length 83.1
  Top Layer w0.381: P1.12 51.181,62.103 51.994,62.916 J8.1 ; U4.3 84.353,18.833 86.614,21.094 86.614,59.69 77.978,68.326 77.978,69.658 76.897,70.739 P3.12
GP28: P1.14
NetD1_1: D1.1 IC1.2 L1.2 | length 17.4
  Top Layer w1.016: IC1.2 31.369,13.146 31.924,12.591 31.924,12.373 34.283,10.014 D1.1 44.623,8.204 L1.2@44.831,8.412
NetD2_2: D2.2 M1.N Q1.3 | length 13.6
  Top Layer w0.762: M1.N 94.742,3.565 94.742,15.158 94.66,15.24 Q1.3
NetIC1_2: 
NetLED1_2: LED1.2 R1.2 | length 5.5
  Top Layer w0.508: LED1.2 17.81,67.557 17.81,67.793 17.897,67.879 R1.2@17.897,72.721
NetQ1_1: Q1.1 R2.2 | length 5.7
  Top Layer w0.762: Q1.1 92.372,18.712 93.701,20.041 93.701,20.625 94.146,21.071 R2.2@94.234,21.071
pads on no net: B1.4 B2.4 B3.4 B4.4 J1.3 P1.10 P1.15 P1.17 P1.20 P3.2 P3.3 P3.4 P3.5 P3.6 P3.10 P3.14 P3.15 P3.16 P3.17 P3.20 P4.15 P4.16 P4.17 P4.18 P4.19 P4.20

## Polygon pours and split planes (outlines as drawn)
GND on Bottom Layer "GND_L02_P014" (solid, pour order 14): 67.158,96.52 67.158,0.89 94.234,0.89 94.234,96.52
GND on Bottom Layer "GND_L02_P005" (solid, pour order 5): 13.335,4.445 60.96,4.445 ccw(c60.96,5.715) 62.23,5.715 62.23,33.655 14.663,33.655
GND on Bottom Layer "GND_L02_P010" (solid, pour order 10): 10.16,0.508 60.96,0.508 ccw(c60.96,3.048) 63.5,3.048 63.5,11.176 ccw(c62.992,11.176) 62.992,11.684 10.16,11.684
GND on Bottom Layer "GND_L02_P012" (solid, pour order 12): 62.23,81.788 62.23,11.176 60.96,11.176 ccw(c60.96,11.684) 61.468,11.684 61.468,81.788
GND on Bottom Layer "GND_L02_P011" (solid, pour order 11): 9.652,88.392 60.96,88.392 cw(c60.96,85.852) 63.5,85.852 63.5,81.788 9.652,81.788
GND on Bottom Layer "GND_L02_P009" (solid, pour order 9): 0.508,85.852 cw(c3.048,85.852) 3.048,88.392 12.192,88.392 12.192,0.508 3.048,0.508 cw(c3.048,3.048) 0.508,3.048 0.508,7.62
GND on Bottom Layer "GND_L02_P003" (solid, pour order 3): 12.7,37.465 61.595,37.465 ccw(c61.595,38.1) 62.23,38.1 62.23,83.82 ccw(c60.325,83.82) 60.325,85.725 13.97,85.725
GND on Bottom Layer "GND_L02_P006" (solid, pour order 6): 24.892,37.541 24.892,33.564 cw(c24.874,33.444) 24.994,33.426 62.23,33.655 62.23,38.1 51.367,38.1
GND on Bottom Layer "GND_L02_P002" (solid, pour order 2): 1.27,83.185 cw(c3.81,83.185) 3.81,85.725 15.24,85.725 15.24,4.445 3.81,4.445 cw(c3.81,6.985) 1.27,6.985 1.27,13.335
+5 on Top Layer "+5_L01_P013" (solid, pour order 13): 34.454,16.51 58.42,16.51 58.42,25.146 56.896,25.146 41.82,25.146

## Other copper
Top Layer:
  region net 3V3: 58.362,12.217 52.324,12.217 52.324,9.652 58.362,9.652
  rectangle net GND: 37.059,25.984 37.338,27.838
  rectangle net GND: 13.782,57.786 15.941,58.903
  rectangle net GND: 13.756,53.874 15.915,54.992
  rectangle net GND: 28.677,25.984 29.032,27.864
  rectangle net GND: 13.248,37.212 15.407,38.329
  rectangle net GND: 13.335,33.35 15.494,34.468
  rectangle net +12: 11.684,13.843 24.79,29.21
  rectangle net +12: 4.572,22.225 22.987,25.146
  rectangle net +12: 19.177,51.831 22.987,53.721
  rectangle net +12: 19.177,31.257 22.479,33.147
  rectangle net +12: 18.034,41.275 20.32,60.198
  region net +12: 24.79,27.305 24.79,33.147 17.247,33.147 17.247,27.305
  rectangle net +12: 18.009,39.116 22.479,40.259
  rectangle net +12: 17.983,31.242 20.32,41.529
  rectangle net +12: 18.009,59.705 22.86,61.595
  rectangle net +12: 11.684,12.319 30.099,15.24
  rectangle net B02_2: 12.7,55.245 15.773,56.261
  rectangle net B02_2: 11.684,54.483 13.589,56.261
  rectangle net B01_2: 11.684,51.943 16.256,53.721
  rectangle net A02_2: 11.43,56.388 13.335,58.166
  rectangle net A02_2: 12.742,56.479 15.917,57.622
  rectangle net A01_2: 11.303,59.055 15.875,61.087
  rectangle net A02_1: 10.795,35.941 12.7,37.719
  rectangle net A02_1: 12.065,35.941 15.24,37.084
  rectangle net B02_1: 11.176,33.909 13.081,35.687
  rectangle net B02_1: 12.192,34.671 15.24,35.687
  rectangle net A01_1: 10.795,38.481 15.367,40.513
  rectangle net B01_1: 11.176,31.369 15.748,33.147

## Silkscreen, mask and mechanical layers (free items; w line width, h text height)
Top Overlay:
  text "3V" at 79.682,85.458 h1.52
  text "USB Side" at 33.249,82.067 h1.52
  text "5V" at 44.346,79.195 h1
  text "GND" at 43.584,76.604 h1
  text "3V3" at 43.533,71.499 h1
  text "+" at 15.873,66.887 h1
  text "Billal was here" at 32.154,66.19 h1
  text "On/Off" at 16,64.945 h1
  text "Driver2" at 15.136,61.11 h1
  text "01100010" at 35.202,56.03 h1
  text "01101001" at 35.202,54.506 h1
  text "01101100" at 34.186,52.982 h1
  text "01101100" at 35.202,51.458 h1
  text "01100001" at 34.186,49.934 h1
  text "01101100" at 35.202,48.41 h1
  text "Pin 22" at 40.79,36.091 h1
  text "Pin 19" at 32.179,36.04 h1
  text "Pin 21" at 40.714,33.297 h1
  text "Pin 20" at 32.357,33.221 h1
  text "Driver1" at 13.866,30.122 h1
  text "Vin" at 18.517,26.035 h1.52
  text "5V" at 59.69,18.034 h1.52
  text "3V3" at 58.674,11.684 h1.52
  text "+" at 87.78,9.889 h1
  text "3V" at 84.582,6.858 h1.52
  text "GND" at 68.326,6.604 h1.52
  text "+" at 36.674,6.495 h1
  text "GND" at 12.014,1.905 h1.52
Bottom Overlay:
  drawing of 75 lines, arcs and shapes, not listed
  text "GP0" at 20.32,85.09 h1.52
  text "GP1" at 25.654,84.836 h1.52
  text "Motor 4" at 3.988,83.464 h1.52 r90
  text "USB Side" at 87.198,81.28 h1.52
  text "KIP Website" at 45.491,76.86 h1
  text "3.3V" at 59.054,74.164 h1.52 r270
  text "Motor 3" at 3.962,69.85 h1.52 r90
  text "GND" at 59.054,68.964 h1.52 r270
  text "LED 1" at 52.354,63.864 h2.54 r270
  text "GP27" at 59.054,61.664 h1.52 r270
  text "Motor 2" at 3.988,56.718 h1.52 r90
  text "GP26" at 59.054,54.764 h1.52 r270
  text "Special thanks to everyone who contributed to this PCB:" at 23.368,49.784 h1
  text "Charlotte" at 15.344,47.648 h1
  text "Diwitha" at 22.964,47.648 h1
  text "3.3V" at 58.854,47.164 h1.52 r270
  text "Ronit" at 22.964,46.124 h1
  text "Zach" at 15.344,45.87 h1
  text "Robb" at 22.964,44.6 h1
  text "Ashton" at 15.344,44.092 h1
  text "Motor 1" at 3.734,43.713 h1.52 r90
  text "Quinn" at 22.964,43.076 h1
  text "Daniel" at 15.344,42.568 h1
  text "GND" at 58.754,41.564 h1.52 r270
  text "Tyler" at 22.964,41.377 h1
  text "Alex" at 15.344,41.044 h1
  text "Jasmine" at 23.218,39.774 h1
  text "Taylor" at 15.344,39.599 h1
  text "Button1" at 74.778,38.76 h1.12
  text "Button3" at 93.066,38.76 h1.12
  text "Ashley" at 22.964,38.329 h1
  text "GP5" at 74.27,36.728 h1.02
  text "GP22" at 92.558,36.728 h1.02
  text "LED 2" at 53.054,34.964 h2.54 r270
  text "Button4" at 93.142,34.366 h1.12
  text "Button2" at 75.387,34.188 h1.12
  text "GP17" at 58.754,34.164 h1.52 r270
  text "GP9" at 74.016,32.41 h1.02
  text "GP21" at 91.796,32.41 h1.02
  text "GND" at 3.531,31.344 h1.52 r90
  text "Knowledge is Power" at 50.546,31.242 h1.52
  text "GP16" at 58.754,27.764 h1.52 r270
  text "Vin" at 3.746,25.956 h1.52 r90
  text "Joystick" at 86.665,25.899 h1.12
  text "Output1" at 88.392,23.453 h1.02
  text "GP26" at 80.239,23.241 h1.02
  text "Output2" at 88.417,21.624 h1.02
  text "GP27" at 80.162,21.209 h1.02
  text "Shoot for the moon, even if you miss, you'll land among the stars" at 63.375,20.371 h1
  text "Switch" at 88.138,19.837 h1.02
  text "GP16" at 80.264,19.583 h1.02
  text "Driver2" at 32.614,18.44 h1.12
  text "Driver1" at 43.282,18.44 h1.12
  text "LED 1" at 50.902,18.186 h1.12
  text "Vcc" at 87.884,18.059 h1.02
  text "3V" at 80.315,17.882 h1.02
  text "GP2" at 32.614,16.408 h1.02
  text "GP9" at 44.044,16.408 h1.02
  text "Shell" at 87.528,16.383 h1.02
  text "GND" at 80.442,16.18 h1.02
  text "PWMA" at 28.55,16.154 h1.02
  text "PWMA" at 39.218,16.154 h1.02
  text "GP27" at 50.394,16.154 h1.02
  text "GP3" at 32.614,14.884 h1.02
  text "GP10" at 44.044,14.884 h1.02
  text "AIN2" at 28.55,14.63 h1.02
  text "AIN2" at 39.218,14.63 h1.02
  text "GP26" at 50.394,14.63 h1.02
  text "GP4" at 32.614,13.36 h1.02
  text "GP11" at 44.044,13.36 h1.02
  text "AIN1" at 28.55,13.106 h1.02
  text "AIN1" at 39.218,13.106 h1.02
  text "GP5" at 32.614,11.836 h1.02
  text "GP12" at 44.044,11.836 h1.02
  text "STBY" at 28.55,11.582 h1.02
  text "STBY" at 39.218,11.582 h1.02
  text "LED 2" at 50.648,11.328 h1.12
  text "GP6" at 32.614,10.312 h1.02
  text "GP13" at 44.044,10.312 h1.02
  text "BIN1" at 28.55,10.058 h1.02
  text "BIN1" at 39.218,10.058 h1.02
  text "GP17" at 50.14,9.296 h1.02
  text "GP7" at 32.614,8.788 h1.02
  text "GP14" at 44.044,8.788 h1.02
  text "BIN2" at 28.55,8.534 h1.02
  text "BIN2" at 39.218,8.534 h1.02
  text "GP16" at 50.14,7.772 h1.02
  text "GP8" at 32.614,7.264 h1.02
  text "GP15" at 44.044,7.264 h1.02
  text "PWMB" at 28.55,7.01 h1.02
  text "PWMB" at 39.218,7.01 h1.02
  text "Motor4" at 29.058,4.978 h1.12
  text "Motor3" at 37.44,4.978 h1.12
  text "Motor2" at 46.076,4.978 h1.12
  text "Motor1" at 53.442,4.978 h1.12
  text "AIN1" at 28.55,2.946 h1.02
  text "BIN1" at 36.424,2.946 h1.02
  text "AIN1" at 45.568,2.946 h1.02
  text "BIN1" at 52.934,2.946 h1.02
  text "AIN2" at 28.55,1.422 h1.02
  text "BIN2" at 36.424,1.422 h1.02
  text "AIN2" at 45.568,1.422 h1.02
  text "BIN2" at 52.934,1.422 h1.02